# EAGLE board WT32-SC01 (EAGLE 9.6.2)
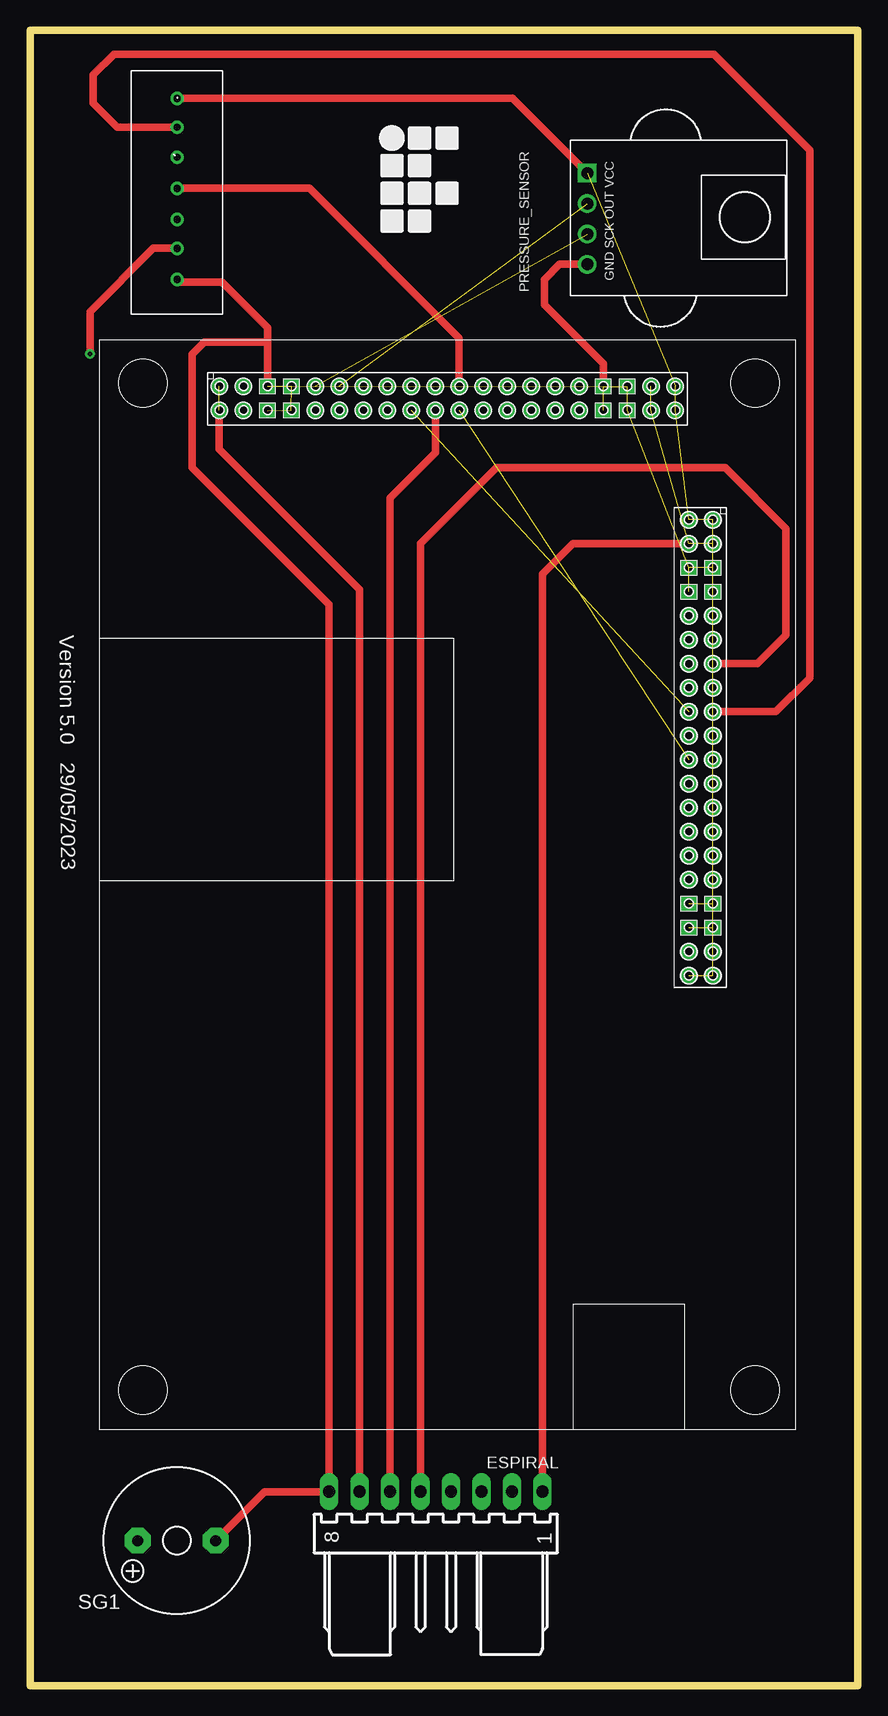
[diagram p0: board, top side]
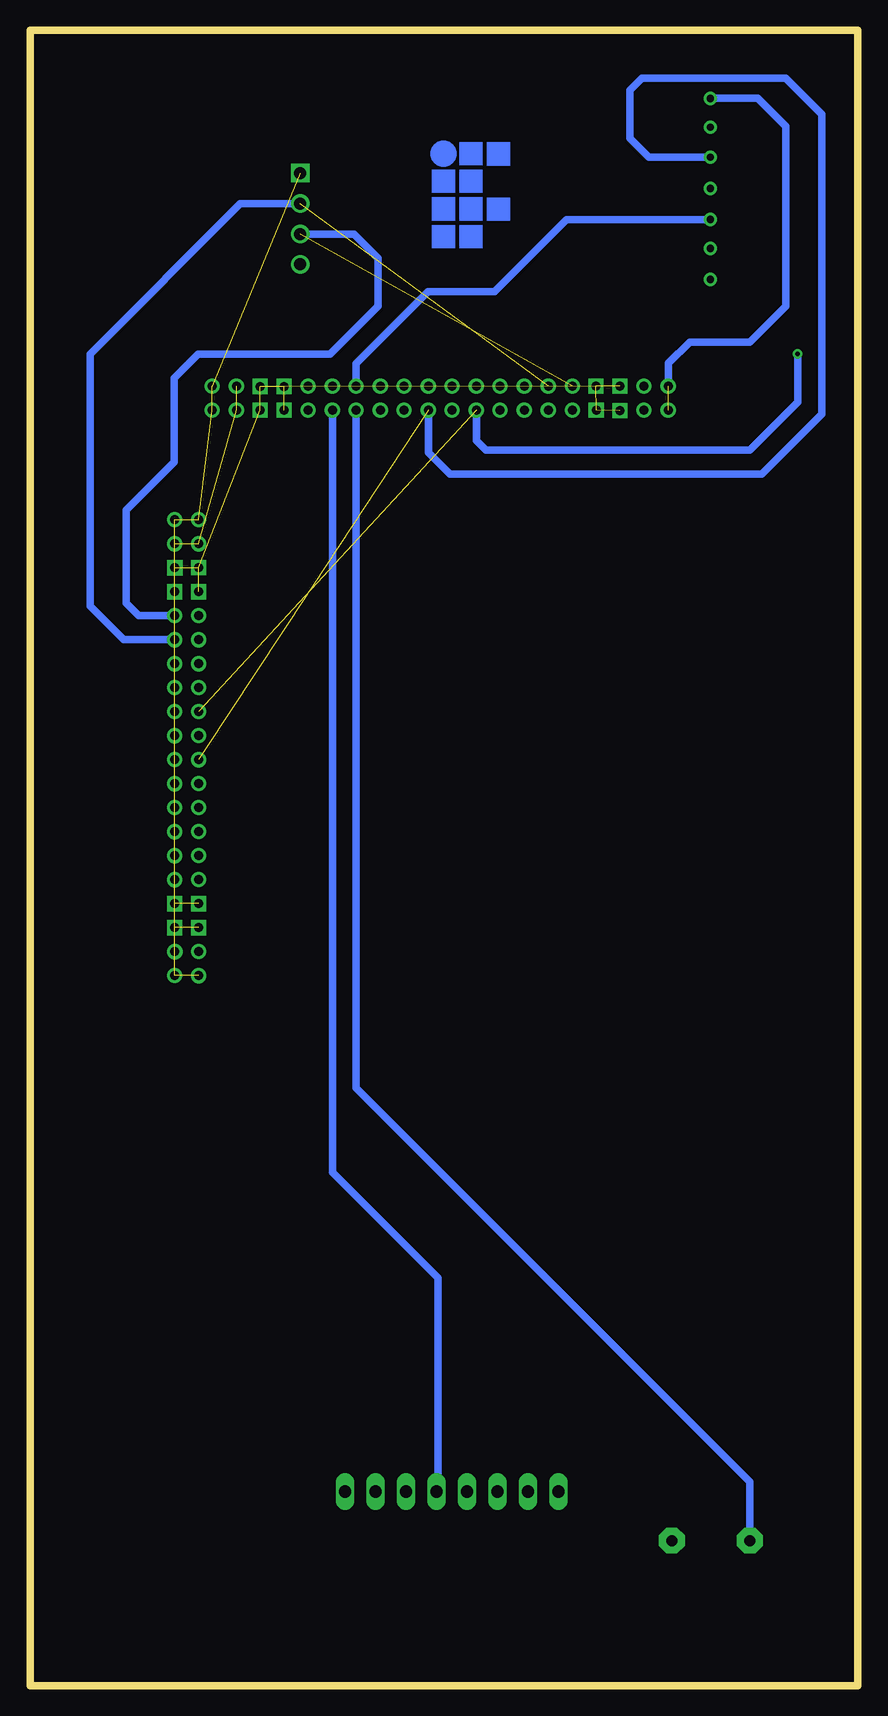
[diagram p1: board, bottom side, seen from below]

Size 69 x 138 mm. Coordinates in mm from the lower left corner, seen from the top.
Outline: 0,138 0,0 69,0 69,138 0,138
Copper layers (1*16): Top 0.035mm / dielectric 1.5mm / Bottom 0.035mm
Design rules "default": minimum track width 6mil, minimum drill 0.35mm, track to track 6mil, track to pad 6mil, pad to pad 6mil, via to via 6mil, smd to smd 6mil, copper to edge 40mil, drill to drill 6mil, minimum pad ring 10mil, minimum via ring 8mil, stop-mask expansion 4mil, vias tented up to drill 0mil, thermal gap 10mil
Net classes: 1 New Class: width 0.5 mm, clearance 0.205 mm to class 0, clearance 0.205 mm

## Footprints (pad centres in the part's own frame; a part is rotated, then mirrored left to right if it is on the bottom)
7395-08 = drill 1.016 long: 1 8.89,0; 2 6.35,0; 3 3.81,0; 4 1.27,0; 5 -1.27,0; 6 -3.81,0; 7 -6.35,0; 8 -8.89,0
MPS20N0040D = drill 1: GND 3.81,-1.338; OUT -1.27,-1.338; SCK 1.27,-1.338 | drill 1 square: VCC -3.81,-1.338
F/QMX = drill 0.914 pad 2.159 octagon: + 3.251,0; - -3.251,0
SENSOR = drill 0.6: A_OUT 14,7.9; GND 14,2.9; HEAT 14,5.5; SCL 14,13.1; SDA 14,10.5; VCC 14,18; WR 14,15.6
WT32 = drill 0.75: 3V3 -22.56,-18.56; 3V3_2 -22.57,-20.55; 3V3_3 11.43,-18.56; 3V3_4 11.43,-20.57; 3V3_5 22.56,-15.42; 3V3_6 24.57,-15.42; 3V3_7 22.56,18.57; 3V3_8 24.57,18.57; 5V -24.57,-18.57; 5V_2 -24.56,-20.56; 5V_3 13.44,-18.56; 5V_4 13.44,-20.57; 5V_5 22.56,-17.43; 5V_6 24.57,-17.43; 5V_7 22.56,20.58; 5V_8 24.57,20.58; EN -8.56,-18.56; EN_2 22.57,-1.43; IO0 -2.56,-18.56; IO0_2 22.56,4.58; IO2 -14.56,-18.57; IO2_2 22.56,-7.42; IO4 -16.56,-18.57; IO4_2 22.56,-9.43; IO5 -0.56,-18.56; IO5_2 22.56,6.57; IO12 -2.56,-20.56; IO12_2 24.57,4.58; IO13 -10.56,-18.57; IO13_2 22.57,-3.42; IO14 -0.56,-20.57; IO14_2 24.57,6.57; IO15 -12.56,-18.57; IO15_2 22.57,-5.43; IO21 -6.56,-20.56; IO21_2 24.58,0.58; IO22 -6.57,-18.57; IO22_2 22.57,0.58; IO23 -4.56,-18.57; IO23_2 22.56,2.57; IO25 1.43,-18.56; IO25_2 22.56,8.58; IO26 3.43,-18.56; IO26_2 22.56,10.58; IO27 1.43,-20.57; IO27_2 24.57,8.58; IO32 3.43,-20.57; IO32_2 24.57,10.58; IO33 5.44,-20.57; IO33_2 24.57,12.59; IO34 -12.57,-20.57; IO34_2 24.58,-5.43; IO35 5.44,-18.56; IO35_2 22.56,12.59; SCL -10.55,-20.57; SCL_2 24.58,-3.42; SDA -8.57,-20.57; SDA_2 24.58,-1.43; SENSOR_VN -14.57,-20.57; SENSOR_VN_2 24.57,-7.42; SENSOR_VP -16.57,-20.57; SENSOR_VP_2 24.57,-9.43; TXD -4.57,-20.57; TXD_2 24.57,2.57 | drill 0.75 square: GND -20.57,-18.56; GND_2 -18.57,-18.56; GND_3 -20.57,-20.56; GND_4 -18.57,-20.56; GND_5 7.43,-18.56; GND_6 9.44,-18.57; GND_7 22.56,-13.43; GND_8 22.56,-11.43; GND_9 24.55,-13.43; GND_10 24.55,-11.43; GND_11 22.57,14.58; GND_12 22.54,16.57; GND_13 24.56,14.57; GND_14 24.56,16.56; P$7 7.43,-20.56; P$8 9.43,-20.55

## Placement (x,y rotation side)
ESPIRAL  Espiral  [7395-08]  33.83,16.16 0 top
PRESSURE_SENSOR  PRESSURE_SENSORWITH_SMDPADS&THROUGHHOLES  [MPS20N0040D]  47.8,122.27 270 top
SG1  F/QMX  [F/QMX]  12.24,12.08 180 top
U$1  SENSOR  [SENSOR]  -1.73,114.3 0 top
U$2  WT32_SC01  [WT32]  36.37,83.74 90 top

## Library data of the parts
ESPIRAL = con-molex; MF: MOLEX; OC_FARNELL: unknown; OC_NEWARK: unknown
PRESSURE_SENSOR = MPS20N0040D-S - PRESSURE SENSOR
SG1 = buzzer; OC_FARNELL: unknown; OC_NEWARK: unknown
U$1 = Sensor+eeprom
U$2 = WT32_SC01

## Nets
3V3: ESPIRAL.1 U$2.3V3_3 U$2.3V3_4 U$2.3V3_5 U$2.3V3_6
5V: ESPIRAL.7 PRESSURE_SENSOR.VCC U$1.VCC U$2.5V U$2.5V_2 U$2.5V_3 U$2.5V_4 U$2.5V_5 U$2.5V_6 U$2.5V_7 U$2.5V_8
GND: ESPIRAL.8 PRESSURE_SENSOR.GND SG1.- U$1.GND U$2.GND U$2.GND_2 U$2.GND_3 U$2.GND_4 U$2.GND_5 U$2.GND_6 U$2.GND_7 U$2.GND_8 U$2.GND_9 U$2.GND_10 U$2.GND_11 U$2.GND_12 U$2.GND_13 U$2.GND_14 U$2.P$7 U$2.P$8
IO0: U$1.HEAT U$2.IO0 U$2.IO0_2
IO02: U$2.IO2
IO22: U$1.SCL U$2.IO22 U$2.IO22_2
IO32: PRESSURE_SENSOR.OUT U$2.IO32 U$2.IO32_2
IO33: PRESSURE_SENSOR.SCK U$2.IO33 U$2.IO33_2
N$1: ESPIRAL.6 U$2.IO23_2
N$2: ESPIRAL.4 U$2.IO2_2
N$3: U$2.3V3_2
N$4: U$2.3V3
N$5: U$2.3V3_8
N$6: U$2.3V3_7
N$8: U$1.A_OUT U$2.IO34_2
N$14: U$1.SDA U$2.IO21_2
N$16: U$1.WR U$2.IO12
N$22: SG1.+ U$2.IO15_2
N$23: ESPIRAL.5 U$2.IO27

## Tracks (layer width: path | path; a pad name or v marks a point on that pad's centre or on a via)
3V3  (3 unrouted)
  Top 0.61: ESPIRAL.1 42.72,92.63 45.26,95.17 U$2.3V3_3
5V  (7 unrouted)
  Top 0.61: ESPIRAL.7 27.48,91.36 15.79,103.05 U$2.5V_7 | PRESSURE_SENSOR.VCC 40.24,132.3 U$1.VCC
  Bottom 0.61: U$2.5V_8 15.79,110.21 14,112 9,112 6,115 6,130 8.3,132.3 U$1.VCC
GND  (15 unrouted)
  Top 0.61: SG1.- 19.57,16.16 ESPIRAL.8 24.94,90.09 13.51,101.52 13.51,111 14.51,112 19.81,112 | PRESSURE_SENSOR.GND 44.14,118.46 42.88,117.21 42.88,115.12 47.8,110.2 U$2.GND_10 | U$1.GND 12.47,117 16,117 19.81,113.19 19.81,112 | 19.81,112 U$2.GND_14
IO0  (via drill 0.35)  (1 unrouted)
  Top 0.61: v5,111 5,114.53 10.27,119.8 U$1.HEAT
  Bottom 0.61: v5,111 5,107 9,103 31,103 31.79,103.79 U$2.IO0_2
IO22  (1 unrouted)
  Bottom 0.61: U$2.IO22_2 35.79,102.79 34,101 8,101 3,106 3,131 6,134 18,134 19,133 19,129 17.4,127.4 U$1.SCL
IO32  (1 unrouted)
  Bottom 0.61: PRESSURE_SENSOR.OUT 51.46,123.54 64,111 64,90 61.17,87.17 U$2.IO32
IO33  (1 unrouted)
  Bottom 0.61: PRESSURE_SENSOR.SCK 42,121 40,119 40,115 44,111 55,111 57,109 57,102 61,98 61,90.22 59.96,89.18 U$2.IO33
N$1
  Top 0.61: ESPIRAL.6 30.02,98.98 33.83,102.79 33.83,106.27 U$2.IO23_2
N$2
  Bottom 0.61: U$2.IO2_2 43.79,42.79 35,34 35,16.26 ESPIRAL.4
N$8
  Bottom 0.61: U$1.A_OUT 24.27,122.2 30.27,116.2 35.8,116.2 41.8,110.2 U$2.IO34_2
N$14
  Top 0.61: U$2.IO21_2 35.79,112.32 23.31,124.8 U$1.SDA
N$16
  Top 0.61: U$1.WR 7.27,129.9 5.27,131.9 5.27,134.27 7,136 57,136 65,128 65,84 62.18,81.18 U$2.IO12
N$22
  Bottom 0.61: SG1.+ 8.99,16.99 41.8,49.8 U$2.IO15_2
N$23
  Top 0.61: ESPIRAL.5 32.56,95.17 38.91,101.52 57.96,101.52 63.04,96.44 63.04,87.55 60.66,85.17 U$2.IO27
(copper drawn outside any net)
  shapes: Bottom area x9, Bottom circle x3

## Text on the board
tNames: Version 5.0 29/05/2023